# EAGLE board preScale-Mb501 (EAGLE 5.07)
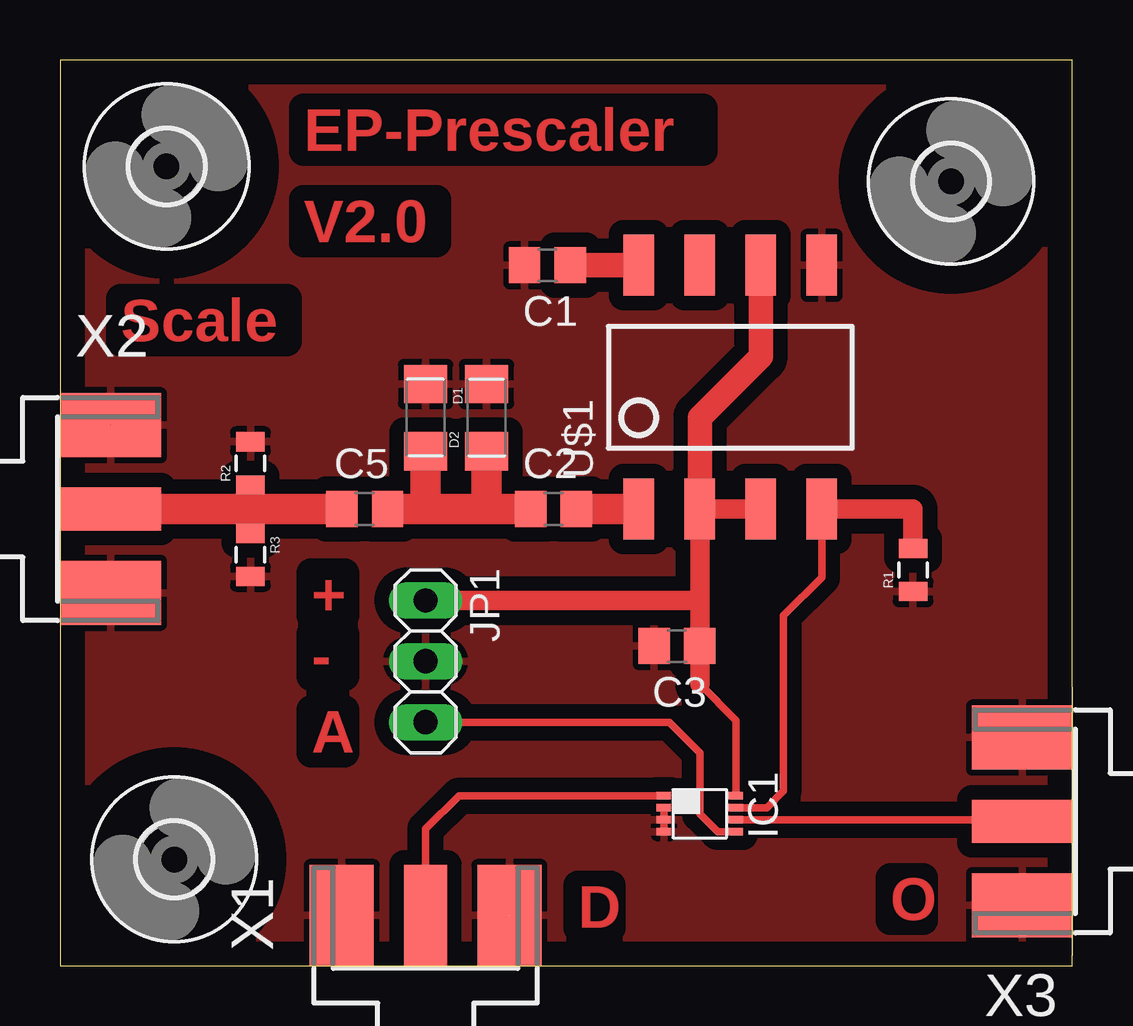
[diagram p0: board, top side]
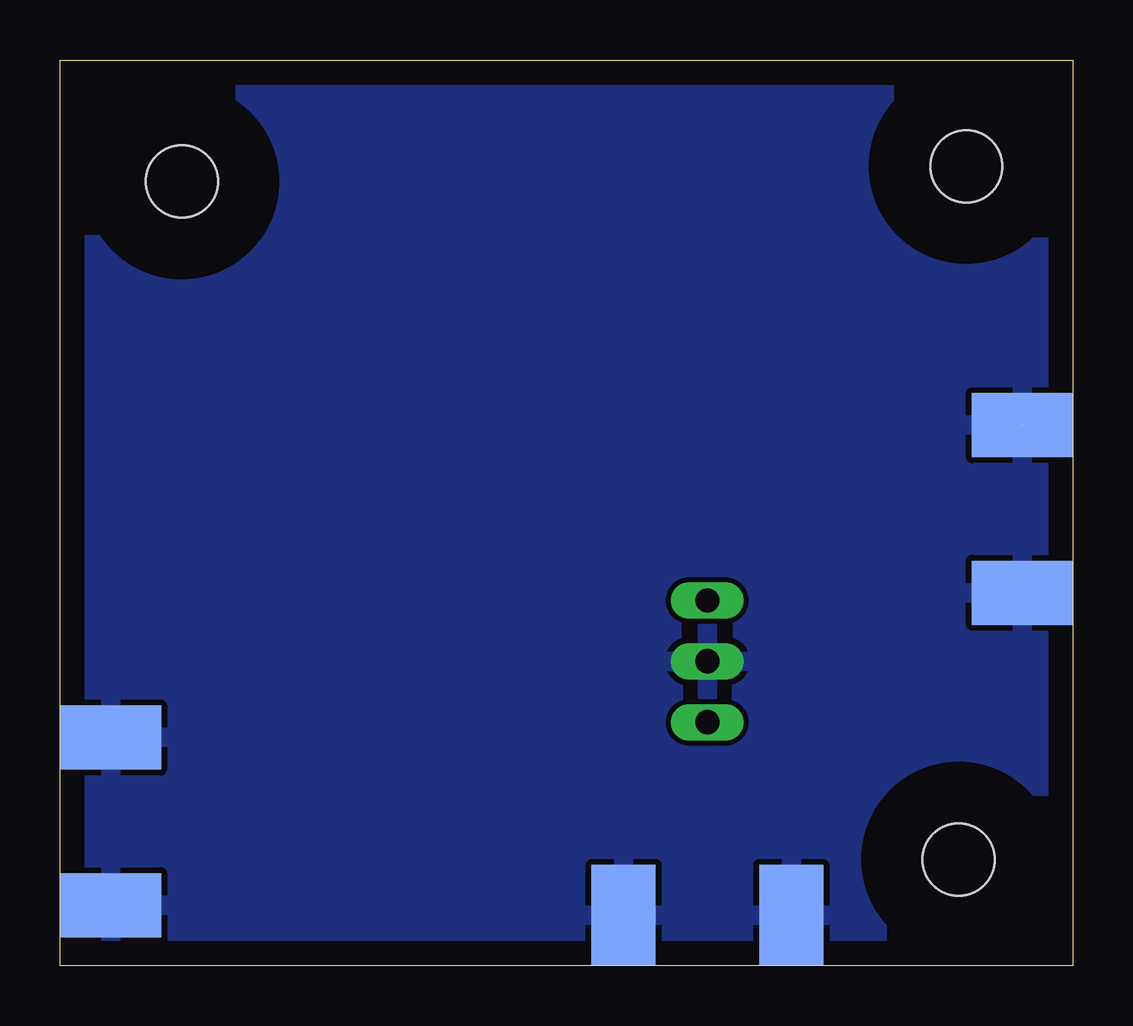
[diagram p1: board, bottom side, seen from below]

Size 42.23 x 37.77 mm. Coordinates in mm from the lower left corner, seen from the top.
Outline: 0,0 42.21,0 42.21,37.77 0,37.77 0,0
Copper layers (1*16): Top 0.035mm / dielectric 1.5mm / Bottom 0.035mm
Design rules "default": minimum track width 10mil, minimum drill 24mil, track to track 8mil, track to pad 8mil, pad to pad 8mil, via to via 8mil, smd to smd 8mil, copper to edge 40mil, drill to drill 8mil, minimum pad ring 10mil, minimum via ring 8mil, stop-mask expansion 4mil, vias tented up to drill 0mil, thermal gap 10mil

## Footprints (pad centres in the part's own frame; a part is rotated, then mirrored left to right if it is on the bottom)
C0805 = smd 1.3 x 1.5: 1 -0.95,0; 2 0.95,0
1206-DIODE = smd 1.6 x 1.8: A -1.4,0; K 1.4,0
3,0 = hole 3: 0,0
DCU_R-PDSO-G8 = smd 0.3 x 0.6: 1 -0.75,-1.5; 2 -0.25,-1.5; 3 0.25,-1.5; 4 0.75,-1.5; 5 0.75,1.5; 6 0.25,1.5; 7 -0.25,1.5; 8 -0.75,1.5
1X03 = drill 1.016 long: 1 -2.54,0; 2 0,0; 3 2.54,0
0805 = smd 0.8 x 1.2: 1 -0.9,0; 2 0.9,0
DIP8-RF = smd 1.27 x 2.54: P$1 0,-3.81; P$2 2.54,-3.81; P$3 5.08,-3.81; P$4 7.62,-3.81; P$5 7.62,6.35; P$6 5.08,6.35; P$7 2.54,6.35; P$8 0,6.35
J502-ND-142-0711-821/826 = smd 4.191 x 1.778: 1 2.115,0 | smd 4.191 x 2.667: G@1 2.115,3.495; G@2 2.115,-3.495 | smd 4.191 x 2.667 bottom: G@3 2.115,3.495; G@4 2.115,-3.495

## Placement (x,y rotation side)
C1  102  [C0805]  20.32,29.21 180 top
C2  102  [C0805]  20.57,19.05 0 top
C3  104  [C0805]  25.72,13.34 180 top
C5  102  [C0805]  12.7,19.05 0 top
D1  [1206-DIODE]  15.24,22.86 270 top
D2  [1206-DIODE]  17.78,22.86 90 top
H1  MOUNT-HOLE3.0  [3,0]  37.15,32.7 0 top
H2  MOUNT-HOLE3.0  [3,0]  4.76,4.45 0 top
H3  MOUNT-HOLE3.0  [3,0]  4.45,33.34 0 top
IC1  2G53  [DCU_R-PDSO-G8]  26.67,6.35 270 top
JP1  [1X03]  15.24,12.7 270 top
R1  2k  [0805]  35.56,16.51 90 top
R2  100R  [0805]  7.94,20.95 90 top
R3  100R  [0805]  7.94,17.14 270 top
U$1  MB504-RF  [DIP8-RF]  24.13,22.86 0 top
X1  SMA-KE  [J502-ND-142-0711-821/826]  15.24,0 90 top
X2  SMA-KE  [J502-ND-142-0711-821/826]  0,19.05 0 top
X3  SMA-KE  [J502-ND-142-0711-821/826]  42.23,6.03 180 top

## Library data of the parts
C1-C3 C5 D1 D2 JP1 R1-R3 = digital-toy
H1-H3 = holes
IC1 = 74xx-little-de
U$1 = dtoy-RF
X1-X3 = con-coax

## Nets
C: IC1.5 JP1.3
GND: C1.2 C3.2 D1.A D2.K IC1.2 IC1.3 IC1.4 JP1.2 R1.1 R2.2 R3.2 U$1.P$5 X1.G@1 X1.G@2 X1.G@3 X1.G@4 X2.G@1 X2.G@2 X2.G@3 X2.G@4 X3.G@1 X3.G@2 X3.G@3 X3.G@4
N$1: C1.1 U$1.P$8
N$2: C2.2 U$1.P$1
N$3: C2.1 C5.2 D1.K D2.A
N$4: IC1.7 R1.2 U$1.P$4
N$5: C5.1 R2.1 R3.1 X2.1
N$6: IC1.1 X1.1
N$8: IC1.6 X3.1
VCC: C3.1 IC1.8 JP1.1 U$1.P$2 U$1.P$3 U$1.P$6

## Tracks (layer width: path | path; a pad name or v marks a point on that pad's centre or on a via)
C
  Top 0.305: IC1.5 27.42,5.6 26.67,6.35 26.67,8.89 25.4,10.16 JP1.3
GND  (2 unrouted)
  Top 0.305: IC1.2 IC1.3 IC1.4
  pour Top (isolate 0.61): 54.29,47.31 54.61,48.58 56.52,12.38 56.52,-7.94 55.88,-11.43 -11.43,-10.79 -12.06,47.31 0.32,47.94
  pour Bottom: 43.81,40.01 55.88,27.94 55.88,2.22 40.96,-12.7 -16.83,-12.7 -25.08,-4.45 -25.08,27.3 -13.65,38.73 -8.89,38.73
N$1
  Top 1.016: C1.1 U$1.P$8
N$2
  Top 1.27: C2.2 U$1.P$1
N$3
  Top 1.27: C5.2 15.24,19.05 | 15.24,19.05 17.78,19.05 | 17.78,19.05 C2.1 | 15.24,19.05 D1.K | 17.78,19.05 D2.A
N$4
  Top 0.305: IC1.7 29.46,6.6 30.16,7.3 30.16,14.61 31.75,16.19 U$1.P$4
  Top 0.813: 35.24,19.05 U$1.P$4 35.56,19.05 R1.2
N$5
  Top 0.305: R2.1 7.94,19.05 R3.1
  Top 1.27: X2.1 7.94,19.05 C5.1
N$6
  Top 0.305: X1.1 15.24,5.71 16.62,7.1 IC1.1
N$8
  Top 0.305: IC1.6 40.05,6.1 arc-90 X3.1
VCC
  Top 0.305: IC1.8 28.17,10.25 26.67,11.75
  Top 0.813: 26.67,11.75 C3.1 26.67,15.24 | 26.67,15.24 U$1.P$2 U$1.P$3 | JP1.1 26.67,15.24
  Top 1.016: U$1.P$2 26.67,22.86 29.21,25.4 U$1.P$6

## Text on the board
Top: EP-Prescaler | V2.0 | Scale | + | - | A | D | O